# EAGLE board ICS43432DigitalI2SMic.v01 (EAGLE 7.6.0)
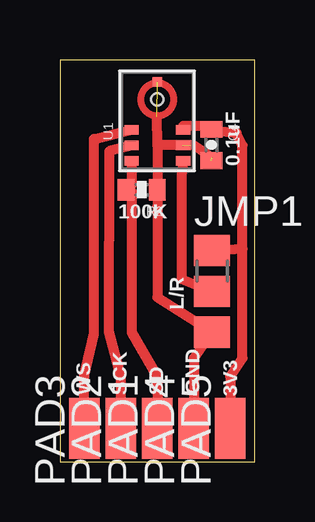
[diagram p0: board, top side]
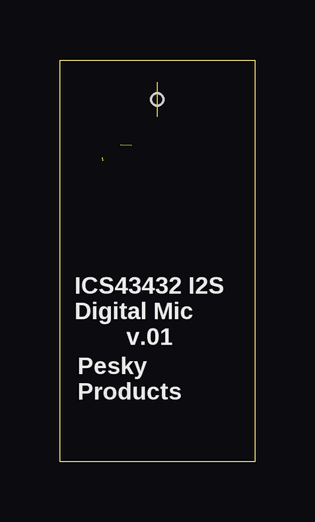
[diagram p1: board, bottom side, seen from below]

Size 8.13 x 16.76 mm. Coordinates in mm from the lower left corner, seen from the top.
Outline: 0,0 8.13,0 8.13,16.76 0,16.76 0,0
Copper layers (1*16): Top 0.0356mm / dielectric 1.5011mm / Bottom 0.0356mm
Design rules "OSHPark *": minimum track width 16mil, minimum drill 13mil, track to track 4mil, track to pad 4mil, pad to pad 6mil, via to via 6mil, smd to smd 6mil, copper to edge 10mil, drill to drill 6mil, minimum pad ring 7mil, minimum via ring 7mil, stop-mask expansion 3mil, vias tented up to drill 20mil, thermal gap 10mil
Net classes: 0 default: clearance 0.205 mm

## Footprints (pad centres in the part's own frame; a part is rotated, then mirrored left to right if it is on the bottom)
0402-CAP = smd 0.7 x 0.9: 1 -0.65,0; 2 0.65,0
A0R-JMP = smd 1.5 x 1.3: 1 0,1.7; 2 0,0; 3 0,-1.7
SMD1,27-2,54 = smd 1.27 x 2.54: 1 0,0
0402-RES = smd 0.7 x 0.9: 1 -0.65,0; 2 0.65,0
ICS43432 = smd 0.4 x 0.6: P$1 -1.675,-1.075; P$2 -1.025,-1.075; P$3 -0.375,-1.075; P$5 -0.375,1.075; P$6 -1.025,1.075; P$7 -1.675,1.075 | smd 0.4 x 0.4: P$4 1.62,0 | hole 0.5: 0.9,0

## Placement (x,y rotation side)
C4  [0402-CAP]  6.32,13.22 270 top
JMP1  0R-JUMPA  [A0R-JMP]  6.35,7.11 0 top
PAD1  SD  [SMD1,27-2,54]  4.06,1.4 0 top
PAD2  [SMD1,27-2,54]  2.54,1.4 0 top
PAD3  [SMD1,27-2,54]  1.02,1.4 0 top
PAD4  [SMD1,27-2,54]  5.59,1.4 0 top
PAD5  [SMD1,27-2,54]  7.11,1.4 0 top
R2  properties  [0402-RES]  3.42,11.35 180 top
U1  ICS43432  [ICS43432]  4.06,14.22 90 top

## Library data of the parts
C4 = SparkFun-Capacitors
JMP1 = jump-0r-smd
PAD1-PAD5 = wirepad
R2 = SparkFun-Passives
U1 = Kris

## Nets
GND: C4.2 JMP1.3 PAD4.1 R2.1 U1.P$2 U1.P$4
LR: JMP1.2 U1.P$1
SCK: PAD2.1 U1.P$6
SD: PAD1.1 R2.2 U1.P$7
VDD: C4.1 JMP1.1 PAD5.1 U1.P$3
WS: PAD3.1 U1.P$5

## Tracks (layer width: path | path; a pad name or v marks a point on that pad's centre or on a via)
GND  (3 unrouted)
  Top 0.406: 6.35,12.7 5.59,13.21 4.06,13.21 | 4.06,13.21 4.06,14.39 | 4.06,13.21 R2.1 4.06,10.67 4.06,6.86 JMP1.3 5.59,4.32 PAD4.1
LR
  Top 0.406: U1.P$1 5.08,11.94 5.08,7.62 JMP1.2
SCK
  Top 0.406: U1.P$6 2.06,12.95 2.03,5.44 2.54,3.56 PAD2.1
SD
  Top 0.406: U1.P$7 3.01,12.48 3.01,11.56 R2.2 3.01,11.26 3.01,5.39 4.08,3.56 PAD1.1
VDD
  Top 0.406: U1.P$3 5.15,14.01 6.07,14.01 C4.1 7.37,13.72 7.62,13.21 7.62,8.89 | PAD5.1 7.11,3.56 7.62,4.32 7.62,8.89 | JMP1.1 7.62,8.89
WS
  Top 0.406: PAD3.1 1.02,3.56 1.42,5.33 1.42,13.46 U1.P$5

## Text on the board
tPlace: 0.1uF | 100K | L/R | WS | SCK | SD | GND | 3V3
bPlace: v.01 | ICS43432 I2S / Digital Mic | Pesky / Products